# Altium PCB ReceiverLoRaRev1.PcbDoc
Units mm, origin at the board's own origin, x right, y up, seen from the top; angles counter-clockwise.
Board outline 68.2 x 27.05 mm, 2 copper layers (Top Layer, Top, Bottom Layer, Bottom); 51 components, 34 nets, 163 pads, 17 vias.
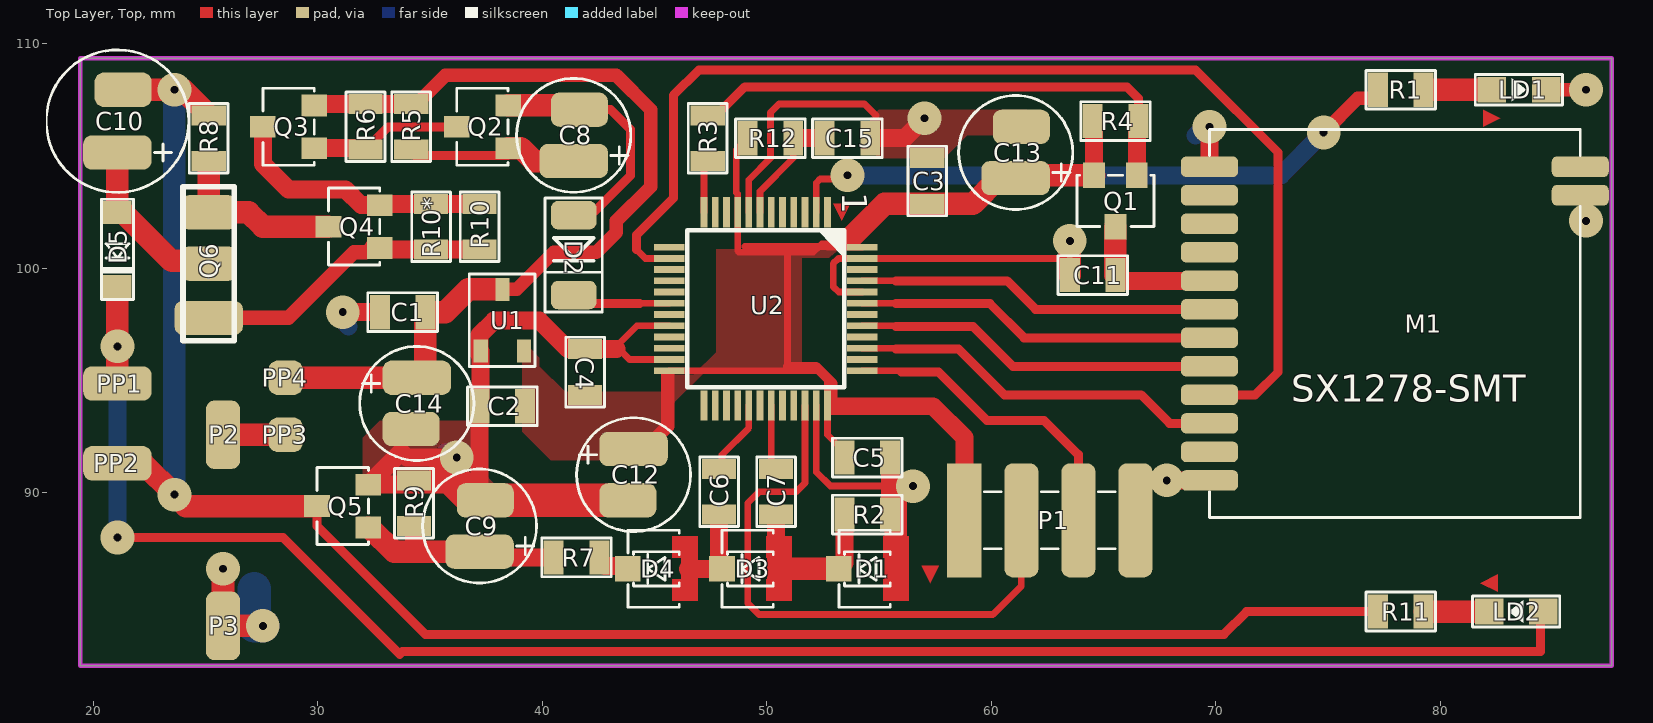
[diagram p0: Top Layer, Top view]
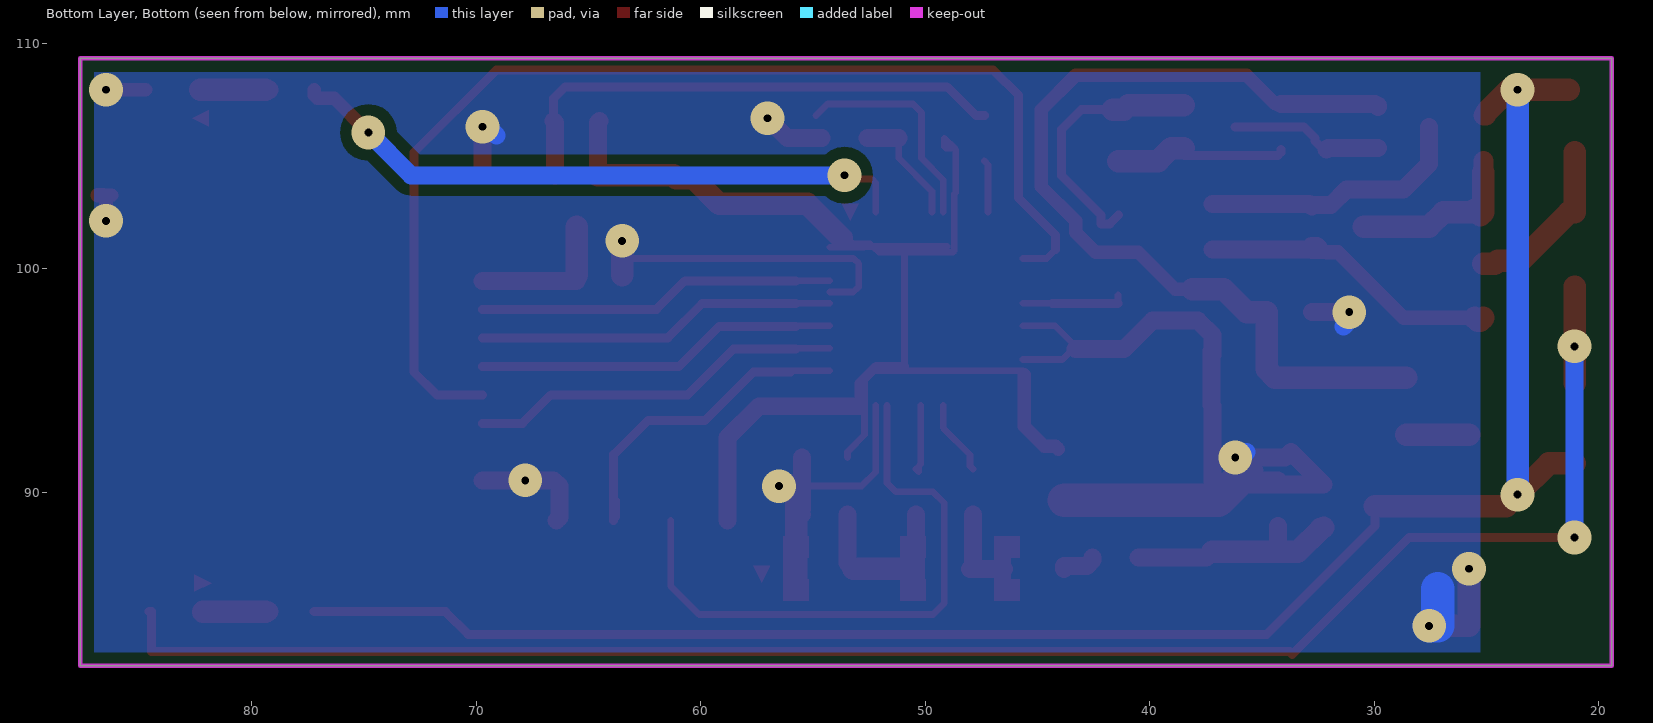
[diagram p1: Bottom Layer, Bottom view, seen from below]

## Layer stack, top to bottom
Top Solder, Top Mask: solder mask 0.0102, Solder Resist, Dk 3.5
Top Layer, Top: signal copper 0.0356
Dielectric 1: dielectric 0.32, FR-4, Dk 4.8
Bottom Layer, Bottom: signal copper 0.0356
Bottom Solder, Bot Mask: solder mask 0.0102, Solder Resist, Dk 3.5

## Board outline
19.431,109.347 19.431,82.296 87.63,82.296 87.63,109.347

## Design rules (kind name [scope] priority, off if disabled: settings)
Clearance Clearance_1 [InNamedPolygon('Bottom Layer, Bottom-GND')] p1: gap=0.5 ignorepadtopadclearanceinfootprint=FALSE
Clearance "Clearance_Top Layer, Top" [ExistsOnLayer('Top Layer, Top') vs ExistsOnLayer('Top Layer, Top')] p2: gap=0.15 ignorepadtopadclearanceinfootprint=FALSE except(0.2: THPad-THPad)
Clearance [All] p3: gap=0.254 ignorepadtopadclearanceinfootprint=FALSE except(0: Arc-Hole Track-Hole SMDPad-Hole THPad-Hole Via-Hole Fill-Hole Poly-Hole Region-Hole Text-Hole; 0.15: THPad-THPad; 0.2: Arc-Arc Arc-Track Arc-THPad Arc-Via Track-Track Track-THPad Track-Via THPad-Via Via-Via)
ComponentClearance [All] p1: gap=0 collisioncheckmode=3 verticalgap=0 showdistances=TRUE
MinimumSolderMaskSliver [All] p1: minsoldermaskwidth=0
PlaneClearance [All] p1: clearance=0.254
PolygonConnect PolygonConnect_6 [IsPolygon And InNet('GND') And OnLayer('Bottom Layer, Bottom') vs IsVia] p1: connectstyle=Direct reliefconductorwidth=0.381 reliefentries=4 polygonreliefangle="90 Angle" airgapwidth=0.254
PolygonConnect PolygonConnect_5 [IsPolygon And InNet('GND') And OnLayer('Bottom Layer, Bottom') vs IsPad] p2: connectstyle=Direct reliefconductorwidth=0.381 reliefentries=4 polygonreliefangle="90 Angle" airgapwidth=0.254
PolygonConnect PolygonConnect_4 [IsPolygon And InNet('GND') And OnLayer('Top Layer, Top') vs IsVia] p3: connectstyle=Direct reliefconductorwidth=0.381 reliefentries=4 polygonreliefangle="90 Angle" airgapwidth=0.254
PolygonConnect PolygonConnect_3 [IsPolygon And InNet('GND') And OnLayer('Top Layer, Top') vs IsPad] p4: connectstyle=Direct reliefconductorwidth=0.381 reliefentries=4 polygonreliefangle="90 Angle" airgapwidth=0.254
PolygonConnect PolygonConnect_2 [IsPolygon And InNet('3V3') And OnLayer('Top Layer, Top') vs IsVia] p5: connectstyle=Direct reliefconductorwidth=0.381 reliefentries=4 polygonreliefangle="90 Angle" airgapwidth=0.254
PolygonConnect PolygonConnect_1 [IsPolygon And InNet('3V3') And OnLayer('Top Layer, Top') vs IsPad] p6: connectstyle=Direct reliefconductorwidth=0.381 reliefentries=4 polygonreliefangle="90 Angle" airgapwidth=0.254
PolygonConnect [All] p7: connectstyle=Relief reliefconductorwidth=0.254 reliefentries=4 polygonreliefangle="90 Angle" airgapwidth=0.254
RoutingVias [All] p1: holewidth=0.711 width=1.27 viastyle="Through Hole" minholewidth=0.711 minwidth=1.27 maxholewidth=0.711 maxwidth=1.27
SilkToSilkClearance [All] p1: silktosilkclearance=0
SilkToSolderMaskClearance [IsPad] p1: minsilkscreentomaskgap=0 clearancetoexposedcopper=TRUE
SolderMaskExpansion [All] p1: expansion=0.102 istentingtop=FALSE
Width [All] p1: maxlimit=2 minlimit=0.2 preferedwidth=0.254
25 further rules are at their usual default settings.

## Components (designator, comment, footprint, x,y, rotation, side; value= is the part's Value field where it differs from the comment)
C1 "1u" C0805 33.782,98.044 r0 top
C2 "1u" C0805 38.227,93.853 r0 top
C3 "100n" C0805 57.15,103.886 r90 top
C4 "1u" C0805 41.91,95.377 r270 top
C5 "100n" C0805 54.483,91.567 r0 top
C6 "1u" C0805 47.879,90.043 r90 top
C7 "1u" C0805 50.419,90.043 r270 top
C8 "47u 16V" ECAP-SD-D5L11 41.402,104.775 r90 top
C9 "47u 16V" ECAP-SD-D5L11 37.211,87.376 r90 top
C10 "100u" ECAP-SD-D6.3L11 21.082,105.156 r90 top
C11 "100n" C0805 64.516,99.695 r0 top
C12 "10u 16V" ECAP-SD-D5L11 44.069,91.948 r270 top
C13 "10u 16V" ECAP-SD-D5L11 61.087,104.013 r90 top
C14 "10u 16V" ECAP-SD-D5L11 34.417,95.123 r270 top
C15 "100n" C0805 53.594,105.791 r0 top
D1 "" SOD323-SOT23 54.356,86.614 r90 top
D2 "" SOD80_1N4148(Primary) 41.402,100.457 r270 top
D3 "" SOD323-SOT23 49.149,86.614 r90 top
D4 "" SOD323-SOT23 44.958,86.614 r90 top
D5 "" SOD-123FL 21.082,100.838 r270 top
LD1 "Yellow" "LED_SMD_0805_FYLS-0805BYC LED(Primary)" 83.439,107.95 r0 top
LD2 "Red" "LED_SMD_0805_FYLS-0805URC LED(Primary)" 83.439,84.709 r180 top
M1 "" SX1278-SMT_MODULE 78.232,96.901 r0 top
P1 "ICSP" PLS-04SMD 62.611,88.773 r0 top
P2 "B+" PAD_RRX60Y120D0T 25.781,92.583 r0 top
P3 "B-" PAD_RRX60Y120D0T 25.781,84.074 r180 top
PP1 "" PAD_RRX60Y120D0T 21.082,94.869 r90 top
PP2 "" PAD_RRX60Y120D0T 21.082,91.313 r90 top
PP3 "JMP" PAD_RRX60Y60D0T 28.575,92.583 r0 top
PP4 "JMP" PAD_RRX60Y60D0T 28.575,95.123 r0 top
Q1 "" SOT23 65.532,102.997 r180 top
Q2 "" SOT23 37.338,106.299 r90 top
Q3 "" SOT23 28.702,106.299 r90 top
Q4 "" SOT23 31.623,101.854 r90 top
Q5 "" SOT23 31.115,89.408 r90 top
Q6 "" "TO225 VH_Primary" 25.146,100.203 r90 top
R1 "10K" R0805 78.232,107.95 r0 top
R2 "100K" R0805 54.483,89.027 r0 top
R3 "1K" R0805 47.371,105.791 r270 top
R4 "10K" R0805 65.532,106.553 r180 top
R5 "10K" R0805 34.163,106.299 r90 top
R6 "10K" R0805 32.131,106.299 r90 top
R7 "150K" R0805 41.529,87.122 r0 top
R8 "62" R0805 25.146,105.791 r90 top
R9 "150K" R0805 34.29,89.535 r90 top
R10 "1" R0805 37.211,101.854 r270 top
R10* "100" R0805 35.052,101.854 r270 top
R11 "1K" R0805 78.232,84.709 r180 top
R12 "1K" R0805 50.165,105.791 r180 top
U1 "" SOT23A 38.227,97.663 r0 top
U2 "" "LQFP48 7X7" 52.705,102.489 r270 top

## Footprints (in the part's own frame and the unit in brackets; to place one, negate y for a bottom-side part, rotate by r counter-clockwise, add the part's x,y. Pads: shape width x height; smd on the part's side, far side on the other; paste and mask are expansions set on the pad)
C0805 [mil]
  rect 35x60 smd: 1(-40,0) 2(40,0)
  silkscreen extent -61,-34 61,34
ECAP-SD-D5L11 [mil]
  rrect50% 60x120 smd: 1(0,0)
  rrect50% 60x100 smd: 2(90,-10)
  silkscreen extent -55,-100 145,100
ECAP-SD-D6.3L11 [mil]
  rrect50% 60x120 smd: 1(0,0)
  rrect50% 60x100 smd: 2(110,-10)
  silkscreen extent -70,-125 180,125
"LED_SMD_0805_FYLS-0805BYC LED(Primary)" [mil]
  rect 50x45 smd: A(-45,0) K(50,0)
  silkscreen extent -74,-27 79,27
"LED_SMD_0805_FYLS-0805URC LED(Primary)" [mil]
  rect 50x45 smd: A(-45,0) K(50,0)
  silkscreen extent -74,-27 79,27
"LQFP48 7X7" [mm]
  rect 1.35x0.3 smd: 1(0,0) 2(0,-0.5) 3(0,-1) 4(0,-1.5) 5(0,-2) 6(0,-2.5) 7(0,-3) 8(0,-3.5) 9(0,-4) 10(0,-4.5) 11(0,-5) 12(0,-5.5) 25(8.6,-5.5) 26(8.6,-5) 27(8.6,-4.5) 28(8.6,-4) 29(8.6,-3.5) 30(8.6,-3) 31(8.6,-2.5) 32(8.6,-2) 33(8.6,-1.5) 34(8.6,-1) 35(8.6,-0.5) 36(8.6,0)
  rect 0.3x1.35 smd: 13(1.55,-7.05) 14(2.05,-7.05) 15(2.55,-7.05) 16(3.05,-7.05) 17(3.55,-7.05) 18(4.05,-7.05) 19(4.55,-7.05) 20(5.05,-7.05) 21(5.55,-7.05) 22(6.05,-7.05) 23(6.55,-7.05) 24(7.05,-7.05) 37(7.05,1.55) 38(6.55,1.55) 39(6.05,1.55) 40(5.55,1.55) 41(5.05,1.55) 42(4.55,1.55) 43(4.05,1.55) 44(3.55,1.55) 45(3.05,1.55) 46(2.55,1.55) 47(2.05,1.55) 48(1.55,1.55)
  silkscreen extent 0.8,-6.25 7.8,0.75
PAD_RRX60Y60D0T [mil]
  rrect50% 60x60 smd: 1(0,0)
PAD_RRX60Y120D0T [mil]
  rrect50% 60x120 smd: 1(0,0)
PLS-04SMD [mil]
  rect 60x200 smd: 1(-150,0)
  rrect50% 60x200 smd: 2(-50,0) 3(50,0) 4(150,0)
  silkscreen extent -115,-50 115,50
R0805 [mil]
  rect 35x60 smd: 1(-40,0) 2(40,0)
  silkscreen extent -61,-34 61,34
SOD80_1N4148(Primary) [mil]
  rrect50% 50x80 smd: A(-75,0) K(65,0)
  silkscreen extent -105,-50 95,50
SOD323-SOT23 [mil]
  round 0 smd paste-1000 mask-1000: 1(0,-61.5)
  rect 45x45 smd: 2(0,45)
  Top Layer, Top region: -56,-77.5 19,-77.5 57,-77.5 57,-32.5 19,-32.5 19,-49 -18,-49 -18,-32.5 -56,-32.5
  silkscreen extent -68,-45 68,45
SOD-123FL [mil]
  rect 40x50 smd: 1(-65,0) 2(65,0)
  silkscreen extent -88,-28 88,28
SOT23 [mil]
  rect 38x45 smd: 1(-37.5,-45) 2(37.5,-45) 3(0,45)
  silkscreen extent -68,-45 68,45
SOT23A [mil]
  rect 25x40 smd: 1(-38,-53) 2(38,-53) 3(0,55)
  silkscreen extent -58,-80 57,82
SX1278-SMT_MODULE [mil]
  rrect50% 100x36 smd: 1(-335,300) 2(-335,250) 3(-335,200) 4(-335,150) 5(-335,100) 6(-335,50) 7(-335,0) 8(-335,-50) 9(-335,-100) 10(-335,-150) 11(-335,-200) 12(-335,-250) 13(315,250) 14(315,300)
  silkscreen extent -335,-315 315,365
"TO225 VH_Primary" [mil]
  rrect50% 60x120 smd: 1(-95,0)
  rrect50% 60x100 smd: 2(0,0) 3(90,0)
  silkscreen extent -135,-45 135,45

## Part data
LD1: "Yellow LED. 2.6Vf"
LD2: "Ultra Red. Vf-1.85V(2.2V max)"

## Via types
v1: diameter 1.5, hole 0.35, Top Layer, Top to Bottom Layer, Bottom, 17 vias

## Nets (pads, with @x,y where several pads share a name; then routed paths per layer and width w, separated by ;. In a path a pad name is that pad's centre, name@x,y a point inside that pad or via, vN(x,y) a via of type N, cw(c..) or ccw(c..) an arc to the next point about the centre after c; other vN are vias at no path point)
3V3: C2.2 C3.1 C4.2 C5.1 C12.1 C13.1 P1.1 Q1.2 R4.2 R12.2 U1.2 U2.9 U2.24 U2.36 U2.48 | length 67.2
  Top Layer, Top w0.3: 45.593,95.25 45.655,95.188 ; 45.655,95.185 45.655,95.188 ; 49.022,100.965 50.927,100.965 ; C5.1 53.467,91.821 52.705,92.583 U2.36 52.705,94.996 52.262,95.439 ; 53.467,101.346 53.213,101.092 52.451,101.092 52.324,100.965 ; 53.721,101.346 53.975,101.092 53.975,100.965 U2.48@54.001,100.939 ; U2.48 U2.48@54.001,100.939 ; 45.655,95.188 U2.24 52.262,95.439 ; R12.2@48.705,105.347 R12.2 49.149,105.41 49.086,105.347 R12.2@48.705,105.347 ; R12.2@48.705,105.347 48.641,105.283 48.641,103.378 48.705,103.314 U2.9 48.705,100.774 48.768,100.711 50.927,100.711 ; 50.927,100.711 50.927,95.631 50.927,95.504 52.197,95.504 52.262,95.439 ; 50.927,100.711 52.07,100.711 52.324,100.965 ; 50.927,100.711 50.927,100.965 ; 50.927,100.965 52.324,100.965 ; 52.324,100.965 52.705,100.965 52.731,100.939 U2.48@54.001,100.939
  Top Layer, Top w0.4: 50.927,95.631 52.197,95.631 52.959,94.869 52.959,93.853
  Top Layer, Top w0.6: C12.1 44.196,92.075 44.704,92.075 45.593,92.964 45.593,95.25
  Top Layer, Top w0.8: 52.959,93.853 57.404,93.853 58.801,92.456 P1.1 ; R4.2 64.579,106.489 Q1.2
  Top Layer, Top w1: 53.721,101.346 55.245,102.87 C3.1 59.182,102.87 60.325,104.013 C13.1 61.214,104.14 Q1.2
/ENSC: D2.K U2.18 | length 4.6
  Top Layer, Top w0.3: D2.K 41.416,98.792 D2.K@41.416,98.439 ; 44.323,98.439 U2.18
  Top Layer, Top w0.4: D2.K@41.416,98.439 44.323,98.439
/INP: C6.2 U2.29 | length 3.4
  Top Layer, Top w0.3: C6.2 48.006,91.186 48.006,91.694 49.205,92.893 U2.29
/RF_0N: R3.2 U2.12 | length 2.4
  Top Layer, Top w0.3: U2.12 47.205,104.609 R3.2
/SS: M1.9 U2.14 | length 51.3
  Top Layer, Top w0.3: 44.196,100.838 44.595,100.439 U2.14
  Top Layer, Top w0.4: 44.196,100.838 44.196,101.473 45.847,103.124 45.847,107.696 46.99,108.839 69.088,108.839 72.771,105.156 72.771,95.377 71.755,94.361 M1.9
GND: C1.1 C2.1 C3.2 C4.1 C5.2 C9.2 C11.1 C12.2 C13.2 C14.2 C15.2 D1.1 LD1.K M1.1 M1.12 M1.13 P1.4 P3.1 Q5.2 R2.2 R9.2 U1.1 U2.8 U2.20 U2.23 U2.35 U2.44 U2.47 | length 105.1
  Top Layer, Top w0.3: U2.23 43.888,95.939 43.434,96.393 43.18,96.393 44.226,97.439 U2.20 ; U2.8 49.205,103.942 50.165,104.902 50.165,106.934 50.546,107.315 54.356,107.315 54.864,106.807 ; U2.35 52.205,90.924 52.832,90.297 55.499,90.297 ; U2.44 53.207,98.939 52.959,99.187 52.959,100.203 53.195,100.439 U2.47 63.482,100.439 63.5,100.457 ; C15.2@54.483,105.918 C15.2 ; R2.2 R2.2@55.499,89.281 ; 55.753,86.868 55.918,86.703 D1.1
  Top Layer, Top w0.6: LD1.K v1(86.487,107.95) ; M1.13 M1.13@86.868,103.251
  Top Layer, Top w0.635: U1.1@37.211,96.139 U1.1@37.262,96.19 ; v1(86.487,102.108) 86.487,103.111 86.627,103.251 M1.13@86.868,103.251
  Top Layer, Top w0.8: v1(31.115,98.044) C1.1 ; R9.2 35.814,90.551 35.941,90.424 35.941,90.297 35.877,90.361 Q5.2 33.718,91.821 33.972,91.567 v1(36.195,91.567) ; U1.1@37.211,96.139 37.211,97.028 37.846,97.663 39.878,97.663 41.148,96.393 C4.1 43.18,96.393 43.307,96.393 ; U1.1 37.262,96.19 37.262,93.904 C2.1 37.211,89.662 37.338,89.535 C9.2 ; C15.2 56.134,105.791 v1(57.023,106.68) ; R2.2 R2.2@55.753,89.027 ; R2.2@55.499,89.281 55.499,89.916 ; C5.2 55.499,90.424 ; 55.753,90.17 55.499,89.916 ; v1(56.515,90.297) 56.515,90.424 55.499,90.424 ; P1.4 66.294,88.9 66.294,89.662 66.294,90.297 66.548,90.551 v1(67.818,90.551) M1.12 ; M1.1 v1(69.723,106.299) ; 55.499,89.916 55.499,90.297 55.499,90.424
  Top Layer, Top w1: v1(56.515,90.297) 55.88,90.297 55.753,90.17 55.753,89.027 55.753,86.868 55.753,86.614 ; C11.1 63.5,100.457 v1(63.5,101.219) ; 55.753,86.614 55.753,85.725 55.791,85.763 55.791,86.487 55.753,86.614
  Top Layer, Top w1.016: v1(25.781,86.614) P3.1 v1(27.559,84.074)
  Top Layer, Top w1.5: 35.687,90.932 36.957,89.662 37.211,89.662 C9.2 C12.2
  Bottom Layer, Bottom w0.8: v1(31.115,98.044) 31.115,97.663 v1@31.369,97.409 ; v1@35.687,91.821 35.941,91.567 v1(36.195,91.567) ; v1@67.691,90.551 v1(67.818,90.551) ; v1@69.088,105.918 69.469,106.299 v1(69.723,106.299)
  Bottom Layer, Bottom w1.5: 27.178,85.725 27.178,84.074 v1(27.559,84.074)
INP: C7.1 U2.31 | length 3.2
  Top Layer, Top w0.3: U2.31 50.205,91.273 50.292,91.186 50.292,90.932 C7.1
IRQ_RF: M1.10 U2.39 | length 16.9
  Top Layer, Top w0.3: U2.39 55.707,96.439 55.753,96.393
  Top Layer, Top w0.4: 55.753,96.393 58.547,96.393 60.579,94.361 66.675,94.361 67.945,93.091 M1.10
MISO: M1.6 U2.45 | length 16
  Top Layer, Top w0.3: U2.45 55.751,99.439 55.753,99.441
  Top Layer, Top w0.4: 55.753,99.441 60.706,99.441 61.976,98.171 M1.6
MOSI: M1.7 U2.43 | length 16.1
  Top Layer, Top w0.3: U2.43 55.739,98.439 55.753,98.425
  Top Layer, Top w0.4: 55.753,98.425 59.944,98.425 61.468,96.901 M1.7
NET00000: C7.2 D1.2 D3.1 R2.1 | length 9.5
  Top Layer, Top w0.8: C7.2 50.419,85.852 50.546,85.725 50.711,85.89 D3.1 ; D1.2 53.467,86.868 R2.1
  Top Layer, Top w1: 50.546,86.614 D3.1 D1.2
NET00001: C10.1 D5.1 Q6.2 | length 7.7
  Top Layer, Top w1: C10.1 D5.1 21.336,102.489 23.495,100.33 24.511,100.33 24.638,100.203 Q6.2
NET00002: C10.2 PP2.1 Q5.3 R8.2 R11.2 | length 82.8
  Top Layer, Top w0.4: Q5.3 29.972,88.519 34.798,83.693 70.358,83.693 71.374,84.709 R11.2
  Top Layer, Top w0.889: R8.2@25.019,106.807 R8.2 25.019,106.934 R8.2@25.019,106.807
  Top Layer, Top w1: PP2.1 22.225,91.313 v1(23.622,89.916) 24.13,89.408 Q5.3 ; C10.2 v1(23.622,107.95) 24.003,107.95 R8.2@25.019,106.934
  Bottom Layer, Bottom w1: v1(23.622,89.916) v1(23.622,107.95)
NET00003: D5.2 LD2.A PP1.1 | length 80.3
  Top Layer, Top w0.4: v1(21.082,88.011) 28.448,88.011 33.655,82.804 33.782,82.931 84.455,82.931 84.455,84.709 LD2.A
  Top Layer, Top w1: PP1.1 v1(21.082,96.52) D5.2
  Bottom Layer, Bottom w0.8: v1(21.082,88.011) v1(21.082,96.52)
NET00004: Q4.1 Q6.1 R10*.2 R10.2 | length 13.6
  Top Layer, Top w0.635: Q6.1@25.527,97.79 28.702,97.79 31.623,100.711 32.14,100.711 32.165,100.736 32.512,100.736 32.575,100.8 Q4.1@32.575,100.901
  Top Layer, Top w0.8: Q4.1 32.766,100.965 32.893,100.838 R10*.2 R10.2
  Top Layer, Top w1: Q6.1 25.273,97.663 25.4,97.663 Q6.1@25.527,97.79 ; Q4.1@32.575,100.901 Q4.1
NET00005: Q4.3 Q6.3 R8.1 | length 8.1
  Top Layer, Top w0.889: 25.146,104.267 R8.1
  Top Layer, Top w1: 25.146,104.267 Q6.3 25.273,102.362 25.527,102.616 25.654,102.489 26.924,102.489 27.559,101.854 Q4.3
NET00006: C6.1 D3.2 D4.1 | length 4
  Top Layer, Top w0.8: 46.482,86.614 D4.1 D3.2 47.879,86.741 C6.1
NET00007: Q3.3 Q4.2 R10*.1 R10.1 | length 12.2
  Top Layer, Top w0.8: Q3.3 27.559,104.648 28.702,103.505 31.242,103.505 31.941,102.806 Q4.2 32.766,102.743 32.893,102.87 R10*.1 R10.1
NET00008: D4.2 R7.2 | length 1.6
  Top Layer, Top w0.8: R7.2 42.545,86.995 42.799,86.741 43.815,86.741 D4.2
NET00009: Q2.3 Q3.1 R6.1 | length 6.9
  Top Layer, Top w0.4: R6.1 32.258,105.283 32.639,105.664 32.639,105.791 33.147,106.299 Q2.3
  Top Layer, Top w0.8: Q3.1 32.067,105.346 R6.1
NET00011: R1.1 U2.2 | length 28.2
  Top Layer, Top w0.3: U2.2 52.205,103.797 52.381,103.972 53.426,103.972 v1(53.594,104.14)
  Top Layer, Top w0.6: v1(74.803,106.045) 76.322,107.564 77.071,107.564 77.216,107.709 R1.1
  Bottom Layer, Bottom w0.8: v1(53.594,104.14) 72.898,104.14 v1(74.803,106.045)
NET00012: LD1.A R1.2 | length 3
  Top Layer, Top w0.889: R1.2 R1.2@79.375,107.95
  Top Layer, Top w1: R1.2@79.375,107.95 LD1.A
NET00013: C9.1 Q5.1 R7.1 R9.1 | length 10
  Top Layer, Top w0.8: 34.29,87.376 R9.1 ; C9.1 37.465,87.122 R7.1
  Top Layer, Top w0.965: Q5.1 32.322,88.392 Q5.1@32.385,88.392
  Top Layer, Top w1: Q5.1@32.385,88.392 33.401,87.376 34.29,87.376 C9.1
NET00015: C8.1 Q2.1 R5.1 | length 8
  Top Layer, Top w0.4: R5.1 34.163,105.156 34.29,105.029 38.481,105.029 Q2.1
  Top Layer, Top w1: Q2.1 38.672,105.346 39.052,105.346 39.624,104.775 41.021,104.775 C8.1
NET00017: C8.2 D2.A Q2.2 | length 11.8
  Top Layer, Top w0.4: D2.A 41.783,101.981 42.164,101.981 42.164,102.362 42.418,102.616 43.942,104.14 43.942,106.172 43.053,107.061 42.037,107.061 C8.2
  Top Layer, Top w1: Q2.2 40.576,107.251 40.957,107.251 41.148,107.061 41.275,107.061 C8.2
NET00020: LD2.K R11.1 | length 2.9
  Top Layer, Top w0.889: R11.1 R11.1@79.375,84.709
  Top Layer, Top w1: R11.1@79.375,84.709 LD2.K
NET00023: Q1.1 R3.1 R4.1 | length 23.4
  Top Layer, Top w0.4: R3.1 47.752,106.807 49.022,108.077 66.04,108.077 66.548,107.569 R4.1
  Top Layer, Top w0.8: Q1.1 66.484,106.489 R4.1
NET00027: P2.1 PP3.1 | length 2.8
  Top Layer, Top w1.016: P2.1 PP3.1
RST: C15.1 R12.1 U2.7 | length 5.3
  Top Layer, Top w0.3: U2.7 49.705,103.426 51.181,104.902 R12.1
  Top Layer, Top w0.8: R12.1 C15.1
SCK: M1.8 U2.41 | length 16.2
  Top Layer, Top w0.3: U2.41 55.723,97.439 55.753,97.409
  Top Layer, Top w0.4: 55.753,97.409 59.182,97.409 60.96,95.631 M1.8
SWCLK: P1.3 U2.37 | length 15
  Top Layer, Top w0.254: 55.945,95.439 56.007,95.377
  Top Layer, Top w0.3: U2.37 55.945,95.439 ; P1.3@63.754,89.662 63.754,88.9 P1.3
  Top Layer, Top w0.4: 56.007,95.377 57.655,95.377 59.814,93.218 62.357,93.218 63.881,91.694 P1.3
SWDIO: P1.2 U2.34 | length 26.7
  Top Layer, Top w0.3: U2.34 51.705,90.44 51.308,90.043 49.657,90.043 49.149,89.535 49.149,85.09 49.657,84.582 60.071,84.582 61.341,85.852 P1.2
VBAT: C1.2 C14.1 PP4.1 Q3.2 R5.2 R6.2 U1.3 | length 41.3
  Top Layer, Top w0.6: R5.2 34.417,107.315 35.687,108.585 43.307,108.585 44.831,107.061 44.831,103.632 43.307,102.108 43.307,101.6 42.418,100.711 40.513,100.711 38.862,99.06 U1.3
  Top Layer, Top w0.635: U1.3@38.1,99.06 U1.3
  Top Layer, Top w0.8: Q3.2 29.845,107.188 29.972,107.315 R6.2 R5.2
  Top Layer, Top w1: C14.1 34.798,95.504 C1.2 35.687,98.044 36.703,99.06 U1.3@38.1,99.06
  Top Layer, Top w1.016: PP4.1 C14.1
VCC_RF: C11.2 M1.5 Q1.3 | length 6.6
  Top Layer, Top w0.8: C11.2 65.532,99.441 M1.5
  Top Layer, Top w1: C11.2 Q1.3
pads on no net: M1.2 M1.3 M1.4 M1.11 M1.14 U2.1 U2.3 U2.4 U2.5 U2.6 U2.10 U2.11 U2.13 U2.15 U2.16 U2.17 U2.19 U2.21 U2.22 U2.25 U2.26 U2.27 U2.28 U2.30 U2.32 U2.33 U2.38 U2.40 U2.42 U2.46

## Polygon pours and split planes (outlines as drawn)
GND on Top Layer, Top "Top Layer, Top-GND" (solid, pour order 3): 32.766,93.218 32.004,92.456 32.004,90.424 35.306,90.424 36.449,89.281 38.227,89.281 38.227,90.043 37.338,90.932 37.338,93.218 33.274,93.218
3V3 on Top Layer, Top "Top Layer, Top-3V3" (solid, pour order 2): 46.736,95.25 45.593,95.25 45.593,93.726 47.371,95.504 51.562,95.504 51.562,100.457 52.832,100.457 53.467,101.092 53.467,101.346 53.213,101.346 52.705,100.838 47.752,100.838 47.752,96.266
GND on Top Layer, Top "Top Layer, Top-GND 1" (solid, pour order 1): 54.61,105.283 54.991,104.902 57.912,104.902 58.928,105.918 62.23,105.918 62.23,106.426 61.595,107.061 54.991,107.061 54.61,106.68 54.61,106.172
3V3 on Top Layer, Top "Top Layer, Top-3V3 1" (solid, pour order 0): 39.116,96.52 39.116,92.71 40.386,91.44 45.212,91.44 45.339,91.567 45.339,94.488 41.021,94.488 39.878,95.631 39.878,95.885 39.878,96.012 39.37,96.52
GND on Bottom Layer, Bottom "Bottom Layer, Bottom-GND" (solid, remove dead copper, pour order 4): 25.273,108.966 25.273,82.677 87.249,82.677 87.249,108.966

## Keep-outs
Keep-Out Layer, Board:
  lines w0.127: 19.431,82.296 87.63,82.296 87.63,109.347 19.431,109.347 19.431,82.296
  lines w0.2: 19.431,82.296 87.63,82.296 87.63,109.347 19.431,109.347 19.431,82.296

## Other copper
Top Layer, Top:
  region: 53.34,102.108 53.721,102.87 52.959,102.87
  region: 82.677,106.68 81.915,107.061 81.915,106.299
  region: 81.788,85.979 82.55,85.598 82.55,86.36
  region: 57.277,85.979 57.658,86.741 56.896,86.741

## Text inside footprints (layer, text, board x,y; h text height)
M1: Top Overlay, Top Silk "SX1278-SMT" at 73.35,94.051 h1.2
U2: Top Overlay, Top Silk "1" at 53.355,103.395 h1.11 r270